# Altium PCB takas.PcbDoc
Units mm, origin at the board's own origin, x right, y up, seen from the top; angles counter-clockwise.
Board outline 32 x 20 mm, 2 copper layers (Top Layer, Bottom Layer); 2 components, 14 nets, 34 pads, 4 vias.
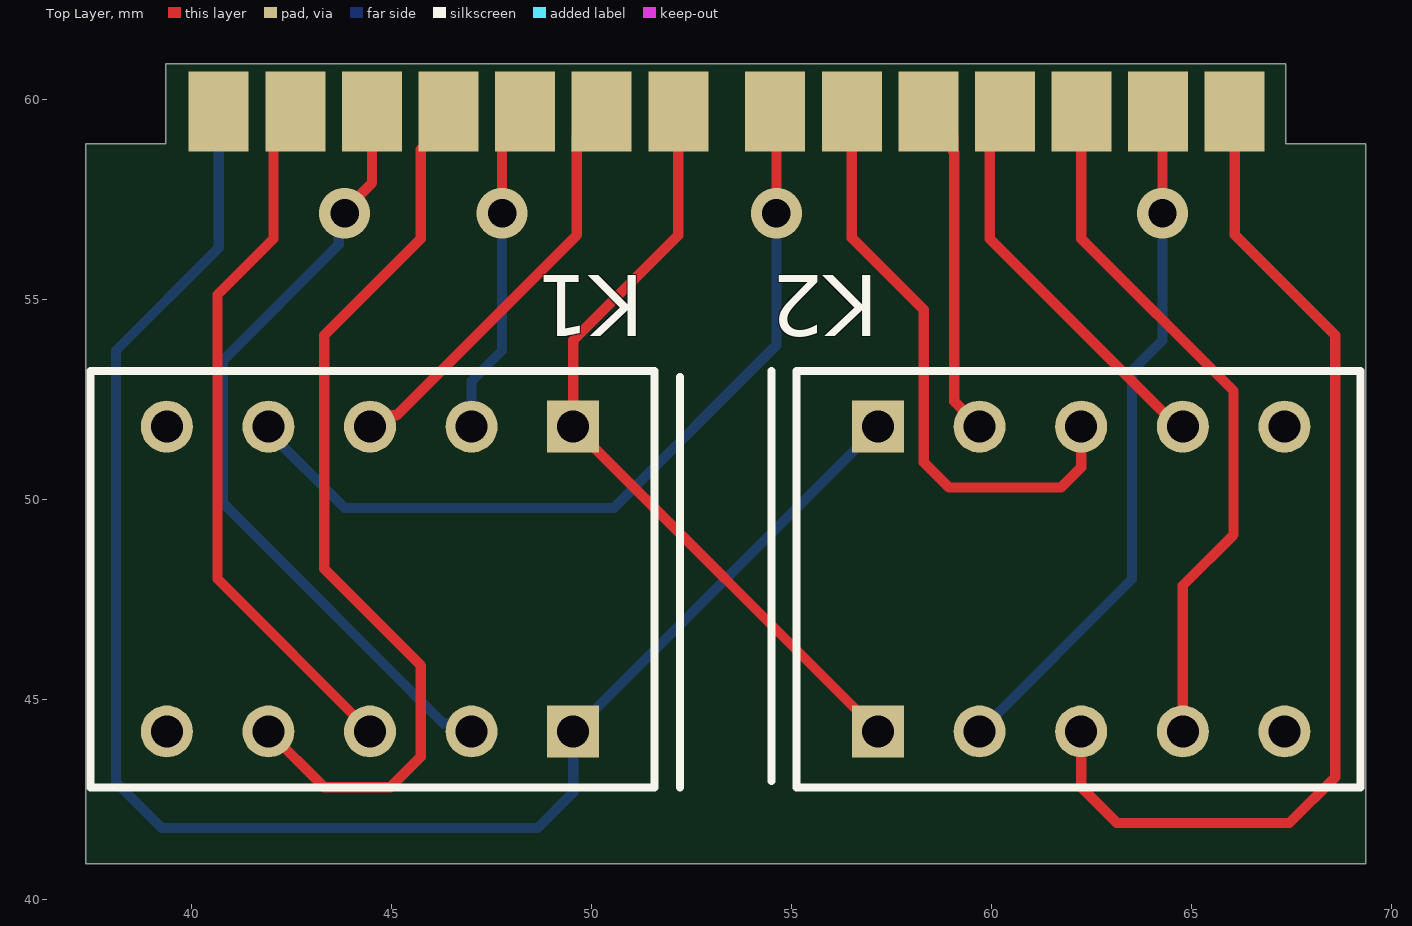
[diagram p0: Top Layer view]
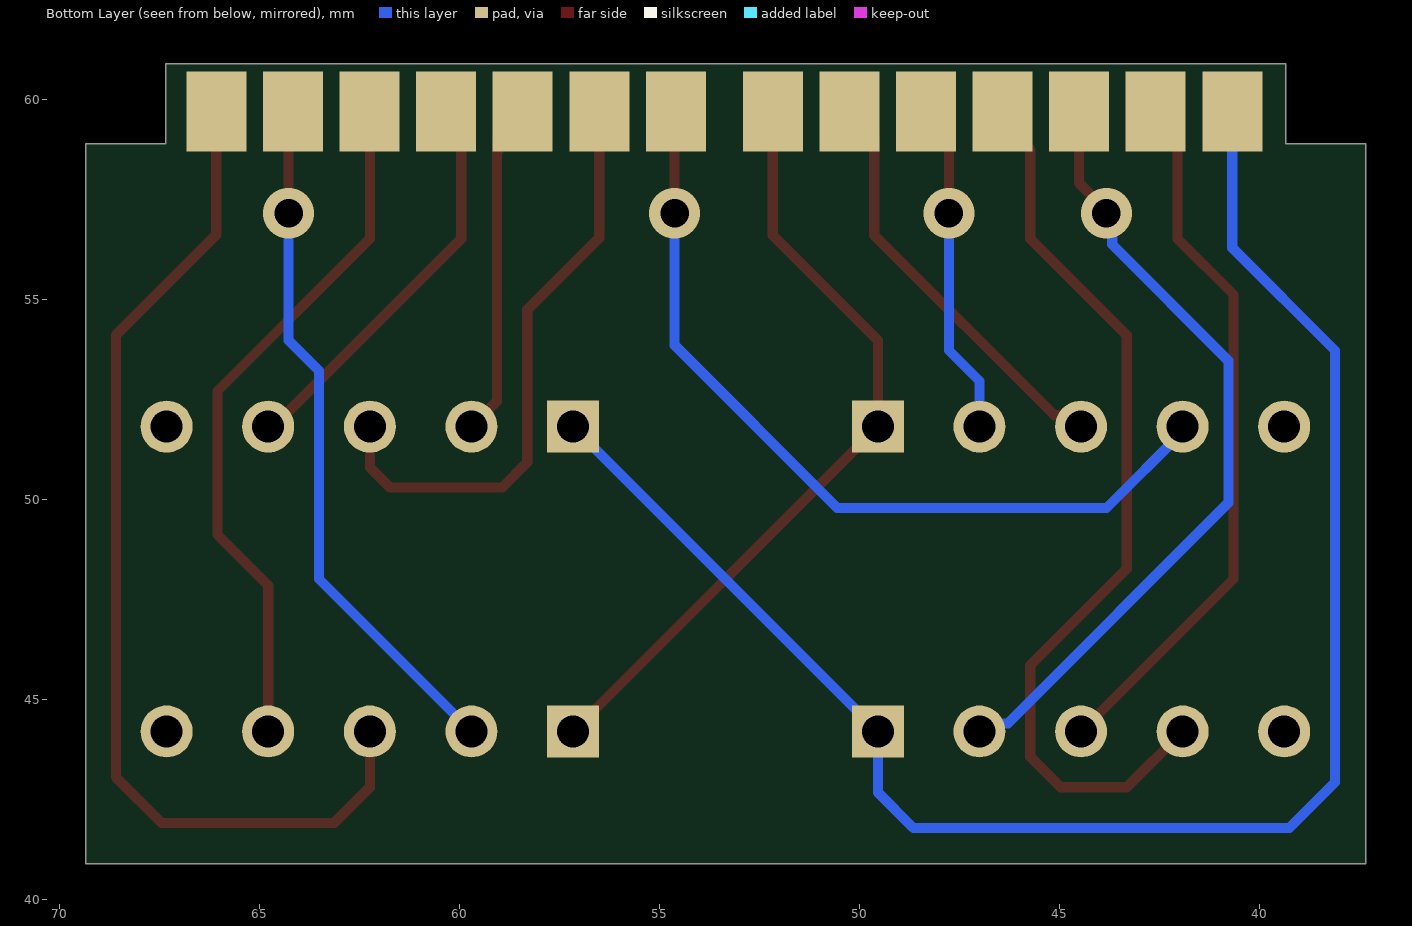
[diagram p1: Bottom Layer view, seen from below]

## Layer stack, top to bottom
Top Solder: solder mask 0.0102, Solder Resist, Dk 3.5
Top Layer: signal copper 0.0356
Dielectric 1: dielectric 0.32, FR-4, Dk 4.8
Bottom Layer: signal copper 0.0356
Bottom Solder: solder mask 0.0102, Solder Resist, Dk 3.5

## Board outline
37.338,40.894 37.338,58.894 39.338,58.894 39.338,60.894 67.338,60.894 67.338,58.894 69.338,58.894 69.338,40.894

## Design rules (kind name [scope] priority, off if disabled: settings)
Clearance [All] p1: gap=0.254 ignorepadtopadclearanceinfootprint=FALSE except(0: Arc-Hole Track-Hole SMDPad-Hole THPad-Hole Via-Hole Fill-Hole Poly-Hole Region-Hole Text-Hole)
PolygonConnect [All] p1: connectstyle=Relief reliefconductorwidth=0.254 reliefentries=4 polygonreliefangle="90 Angle" airgapwidth=0.254
RoomDefinition takas [InComponentClass('takas')] p1: confinementstyle=ConfineIn formatcopy=TRUE lockcomponents=FALSE outline 37.338,41.021 69.342,41.021 69.342,58.801 37.338,58.801
RoutingVias [All] p1: holewidth=0.711 width=1.27 viastyle="Through Hole" minholewidth=0.711 minwidth=1.27 maxholewidth=0.711 maxwidth=1.27
SolderMaskExpansion [All] p1: expansion=0.102 istentingtop=FALSE
Width [All] p1: maxlimit=0.254 minlimit=0.254 preferedwidth=0.254
30 further rules are at their usual default settings.

## Components (designator, comment, footprint, x,y, rotation, side; value= is the part's Value field where it differs from the comment)
K1 "ReleDPDT" A5WK 49.53,51.816 r180 top
K2 "ReleDPDT" A5WK 57.15,44.196 r0 top

## Footprints (in the part's own frame and the unit in brackets; to place one, negate y for a bottom-side part, rotate by r counter-clockwise, add the part's x,y. Pads: shape width x height; smd on the part's side, far side on the other; paste and mask are expansions set on the pad)
A5WK [mm] "A5WK"
  rect 1.3x1.3 hole 0.8: 1(0,0) 12(0,7.62)
  round 1.3 hole 0.8: 2(2.54,0) 3(5.08,0) 4(7.62,0) 5(10.16,0) 6(10.16,7.62) 8(7.62,7.62) 9(5.08,7.62) 10(2.54,7.62)
  silkscreen extent -2.67,-1.4 12.06,9.02, body extent -2.03,-1.4 12.06,9.02, height 5.01

## Part data
K1 K2: library part 251, "Electromecánicos Relés  [A5WK / Fujitsu]", apto_para_cenelec=0, codigo_ena=5945003811, componente_asociado_id=251, fabricante=Fujitsu, id=8, modelo=A5WK, obsoleto=0, subtipo=Relés

## Free pads (board coordinates)
  rect 1.5x2 all layers, no hole: 1(46.412,59.69) 2(42.593,59.69) 3(44.498,59.69) 4(54.579,59.69) 5(50.242,59.69) 6(48.327,59.69) 7(52.157,59.69) 8(40.668,59.69) 9(64.153,59.69) 10(66.068,59.69) 11(62.238,59.69) 12(58.409,59.69) 13(56.494,59.69) 14(60.324,59.69)

## Via types
v1: diameter 1.27, hole 0.711, Top Layer to Bottom Layer, 4 vias

## Nets (pads, with @x,y where several pads share a name; then routed paths per layer and width w, separated by ;. In a path a pad name is that pad's centre, name@x,y a point inside that pad or via, vN(x,y) a via of type N, cw(c..) or ccw(c..) an arc to the next point about the centre after c; other vN are vias at no path point)
+5: K1.1 K2.1 pad.7 | length 19.7
  Top Layer w0.254: pad.7 52.157,56.602 49.53,53.975 K1.1 K2.1
C_1.1: K1.9 pad.2 | length 17.9
  Top Layer w0.254: pad.2 42.037,59.134 42.037,56.515 40.64,55.118 40.64,48.006 K1.9
C_1.2: K1.3 pad.5 | length 10.5
  Top Layer w0.254: K1.3 44.733,51.816 45.018,52.101 45.116,52.101 49.619,56.604 49.619,59.067 pad.5
C_2.1: K2.9 pad.13 | length 14.9
  Top Layer w0.254: pad.13 56.494,56.536 58.293,54.737 58.293,50.927 58.928,50.292 61.722,50.292 62.23,50.8 K2.9
C_2.2: K2.3 pad.10 | length 26.3
  Top Layer w0.254: K2.3 62.23,42.799 63.119,41.91 67.437,41.91 68.58,43.053 68.58,54.102 66.068,56.614 pad.10
GND: K1.12 K2.12 pad.8 | length 42.4
  Bottom Layer w0.254: pad.8 40.668,56.289 38.1,53.721 38.1,42.926 39.243,41.783 48.641,41.783 49.53,42.672 K1.12 K2.12
NC_1.1: K1.10 pad.3 | length 20.1
  Top Layer w0.254: v1(43.815,57.15) 43.815,57.222 44.498,57.904 pad.3 ; K1.10@46.863,44.323 K1.10
  Bottom Layer w0.254: v1(43.815,57.15) 43.668,57.003 43.668,56.368 40.767,53.467 40.767,49.911 46.282,44.396 46.79,44.396 K1.10
NC_1.2: K1.2 pad.6 | length 8.5
  Top Layer w0.254: K1.2 K1.2@47.048,51.758 ; v1(47.752,57.15) 47.752,59.115 pad.6
  Bottom Layer w0.254: K1.2 46.99,52.959 47.752,53.721 v1(47.752,57.15)
NC_2.1: K2.10 pad.12 | length 8.4
  Top Layer w0.254: pad.12 59.032,59.067 59.032,58.691 59.055,58.668 59.055,52.451 K2.10
NC_2.2: K2.2 pad.9 | length 17.4
  Top Layer w0.254: pad.9 64.262,59.581 v1(64.262,57.15)
  Bottom Layer w0.254: K2.2 63.5,48.006 63.5,53.213 64.262,53.975 v1(64.262,57.15)
NO_1.1: K1.8 pad.1 | length 23.1
  Top Layer w0.254: K1.8 43.307,42.799 44.958,42.799 45.72,43.561 45.72,45.847 43.307,48.26 43.307,54.102 45.72,56.515 45.72,58.748 46.412,59.44 pad.1
NO_1.2: K1.4 pad.4 | length 21.2
  Top Layer w0.254: K1.4 K1.4@41.968,51.758 ; pad.4 54.61,59.659 v1(54.61,57.15)
  Bottom Layer w0.254: K1.4 41.91,51.689 43.815,49.784 50.546,49.784 54.61,53.848 v1(54.61,57.15)
NO_2.1: K2.8 pad.14 | length 10.1
  Top Layer w0.254: pad.14 59.944,59.31 59.944,56.515 64.643,51.816 K2.8
NO_2.2: K2.4 pad.11 | length 17.6
  Top Layer w0.254: pad.11 62.23,59.682 62.23,56.515 66.04,52.705 66.04,49.116 64.77,47.846 K2.4
pads on no net: K1.5 K1.6 K2.5 K2.6